# EAGLE board TriggerTone (EAGLE 9.6.1)
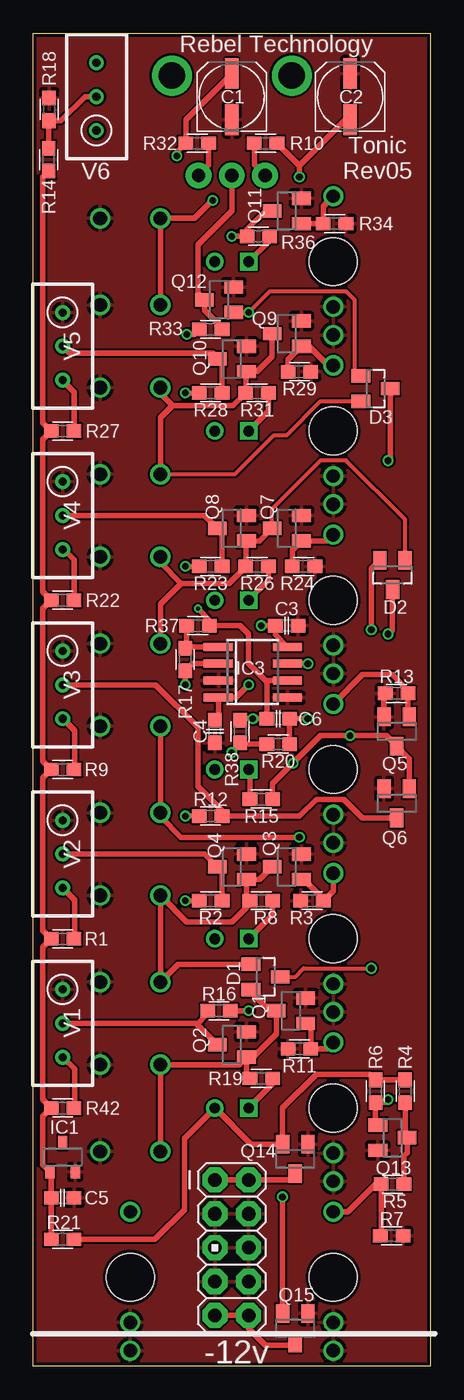
[diagram p0: board, top side]
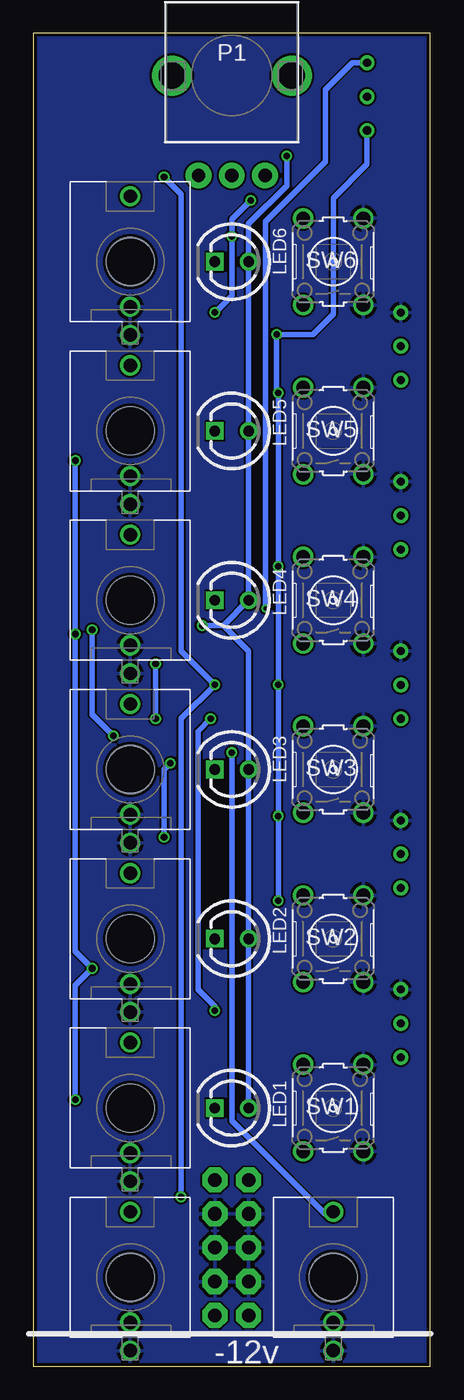
[diagram p1: board, bottom side, seen from below]

Size 29.8 x 100 mm. Coordinates in mm from the lower left corner, seen from the top.
Outline: 0,0 0,100 29.8,100 29.8,0 0,0
Copper layers (1*16): Top 0.035mm / dielectric 1.5mm / Bottom 0.035mm
Design rules "SeeedStudio_2layer_DRU_no_angle_20140221": minimum track width 6mil, minimum drill 12mil, track to track 6mil, track to pad 6mil, pad to pad 6mil, via to via 6mil, smd to smd 0mil, copper to edge 10mil, drill to drill 10mil, minimum pad ring 10mil, minimum via ring 6mil, stop-mask expansion 2mil, vias tented up to drill 100mil, thermal gap 10mil

## Footprints (pad centres in the part's own frame; a part is rotated, then mirrored left to right if it is on the bottom)
CPOL-5 = smd 2.3 x 1: + 1.725,0; - -1.725,0
C0603 = smd 1.1 x 1: 1 -0.85,0; 2 0.85,0
SOT23 = smd 1 x 1.4: 1 -0.95,-1.1; 2 0.95,-1.1; 3 0,1.1
DBZ_R-PDSO-G3 = smd 0.7 x 1: 1 -0.95,-1.1; 2 0.95,-1.1; 3 0,1.1
SO08 = smd 0.6 x 2.2: 1 -1.905,-2.6; 2 -0.635,-2.6; 3 0.635,-2.6; 4 1.905,-2.6; 5 1.905,2.6; 6 0.635,2.6; 7 -0.635,2.6; 8 -1.905,2.6
THONKICONN = drill 1: P$1 0,-5.5; P$2 0,-3.38; P$3 0,4.92 | hole 3.6: 0,0
AVR_ICSP = drill 1.016 pad 1.88 octagon: 1 -1.27,5.08; 2 1.27,5.08; 3 -1.27,2.54; 4 1.27,2.54; 5 -1.27,0; 6 1.27,0; 7 -1.27,-2.54; 8 1.27,-2.54; 9 -1.27,-5.08; 10 1.27,-5.08
LED3MM = drill 0.813: A -1.27,0 | drill 0.813 square: K 1.27,0
POT-ALPS-RK09L1140 = drill 1 pad 1.93: 1 -2.5,-7.5; 2 0,-7.5; 3 2.5,-7.5 | drill 2: P$5 -4.5,0; P$6 4.5,0
0603 = smd 1.1 x 1: 1 -0.85,0; 2 0.85,0
B3F-10XX = drill 1.016: 1 -3.251,2.261; 2 3.251,2.261; 3 -3.251,-2.261; 4 3.251,-2.261
RTRIM3296W = drill 0.61: 1 0,-2.54; 2 0,0; 3 0,2.54

## Placement (x,y rotation side)
C1  47u  [CPOL-5]  14.9,95.25 90 top
C2  47u  [CPOL-5]  23.79,95.25 90 top
C3  100n  [C0603]  19.03,55.56 0 top
C4  100n  [C0603]  13.63,47.62 270 top
C5  100n  [C0603]  2.2,12.64 0 top
C6  39p  [C0603]  18.39,48.58 180 top
D1  BAT54A  [SOT23]  17.44,29.21 270 top
D2  BAT54A  [SOT23]  26.96,59.37 180 top
D3  BAT54A  [SOT23]  25.69,73.34 270 top
IC1  LM4040DIM3-10.0  [DBZ_R-PDSO-G3]  2.2,15.68 0 top
IC3  TL072D  [SO08]  16.49,52.07 270 top
IN_1  THONKICONN  [THONKICONN]  22.52,19.37 0 bottom
IN_2  THONKICONN  [THONKICONN]  22.52,32.07 0 bottom
IN_3  THONKICONN  [THONKICONN]  22.52,44.77 0 bottom
IN_4  THONKICONN  [THONKICONN]  22.52,57.47 0 bottom
IN_5  THONKICONN  [THONKICONN]  22.52,70.17 0 bottom
IN_6  THONKICONN  [THONKICONN]  22.52,82.87 0 bottom
JP8  M05X2PTH  [AVR_ICSP]  14.9,8.89 0 top
LED1  [LED3MM]  14.9,19.37 180 bottom
LED2  [LED3MM]  14.9,32.07 180 bottom
LED3  [LED3MM]  14.9,44.77 180 bottom
LED4  [LED3MM]  14.9,57.47 180 bottom
LED5  [LED3MM]  14.9,70.17 180 bottom
LED6  [LED3MM]  14.9,82.87 180 bottom
OUT_CV  THONKICONN  [THONKICONN]  7.28,6.67 0 bottom
OUT_TR  THONKICONN  [THONKICONN]  22.52,6.67 0 bottom
P1  POT-ALPS-RK09L1140  [POT-ALPS-RK09L1140]  14.9,96.84 0 bottom
Q1  BSS123  [SOT23]  19.34,26.67 90 top
Q2  BSS123  [SOT23]  14.9,24.13 90 top
Q3  BSS123  [SOT23]  19.03,37.47 90 top
Q4  BSS123  [SOT23]  14.9,37.47 90 top
Q5  BSS123  [SOT23]  27.28,47.62 180 top
Q6  BSS123  [SOT23]  27.28,42.23 180 top
Q7  BSS123  [SOT23]  19.03,62.87 90 top
Q8  BSS123  [SOT23]  14.9,62.87 90 top
Q9  BSS123  [SOT23]  19.03,77.47 90 top
Q10  BSS123  [SOT23]  14.9,75.56 90 top
Q11  BSS123  [SOT23]  19.03,86.67 90 top
Q12  BSS123  [SOT23]  13.95,80.01 90 top
Q13  BSS123  [SOT23]  26.96,17.14 270 top
Q14  BSS84  [SOT23]  19.66,15.56 180 top
Q15  BSS123  [SOT23]  19.66,2.86 180 top
R1  51k  [0603]  2.2,32.07 180 top
R2  100k  [0603]  13.31,34.93 0 top
R3  100k  [0603]  20.93,34.93 0 top
R4  1k  [0603]  27.92,20.64 90 top
R5  100R  [0603]  26.96,13.65 0 top
R6  10k  [0603]  25.69,20.64 90 top
R7  1k  [0603]  26.9,9.78 0 top
R8  2k  [0603]  17.12,34.93 0 top
R9  51k  [0603]  2.2,44.77 180 top
R10  36k  [0603]  17.44,91.76 180 top
R11  100k  [0603]  19.98,23.81 0 top
R12  100k  [0603]  13.31,41.28 0 top
R13  100k  [0603]  27.28,50.48 0 top
R14  1M  [0603]  1.15,90.52 270 top
R15  2k  [0603]  17.12,42.55 180 top
R16  100k  [0603]  13.95,26.67 180 top
R17  100k  [0603]  11.41,53.02 270 top
R18  100k  [0603]  1.18,94.3 270 top
R19  2k  [0603]  17.12,21.59 0 top
R20  1k  [0603]  18.39,46.67 0 top
R21  150R  [0603]  2.2,9.53 0 top
R22  33k  [0603]  2.2,57.47 180 top
R23  100k  [0603]  13.31,60.01 0 top
R24  100k  [0603]  20.3,60.01 180 top
R26  2k  [0603]  16.8,60.01 0 top
R27  33k  [0603]  2.2,70.17 180 top
R28  100k  [0603]  13.31,73.02 0 top
R29  100k  [0603]  19.98,74.61 180 top
R31  2k  [0603]  16.8,73.02 0 top
R32  36k  [0603]  12.3,91.76 180 top
R33  100k  [0603]  13.31,77.79 0 top
R34  100k  [0603]  22.62,85.72 180 top
R36  2k  [0603]  16.91,84.77 0 top
R37  100k  [0603]  12.36,55.56 180 top
R38  100k  [0603]  15.53,47.62 90 top
R42  51k  [0603]  2.2,19.37 180 top
SW1  [B3F-10XX]  7.28,19.37 90 bottom
SW2  [B3F-10XX]  7.28,32.07 90 bottom
SW3  [B3F-10XX]  7.28,44.77 90 bottom
SW4  [B3F-10XX]  7.28,57.47 90 bottom
SW5  [B3F-10XX]  7.28,70.17 90 bottom
SW6  [B3F-10XX]  7.28,82.87 90 bottom
V1  B10k  [RTRIM3296W]  2.2,25.72 180 top
V2  B10k  [RTRIM3296W]  2.2,38.42 180 top
V3  B10k  [RTRIM3296W]  2.2,51.12 180 top
V4  B10k  [RTRIM3296W]  2.2,63.82 180 top
V5  B10k  [RTRIM3296W]  2.2,76.52 180 top
V6  B10k  [RTRIM3296W]  4.74,95.25 0 top

## Library data of the parts
C1-C6 IN_1-IN_6 LED1-LED6 OUT_CV OUT_TR P1 R1-R24 R26-R29 R31-R34 R36-R38 R42 = Rebel
D1-D3 = diode
IC1 = texas; MPN: LM4041A12IDBZR; OC_FARNELL: 1407949; OC_NEWARK: 58K5875
IC3 = linear
JP8 = SparkFun
Q1-Q13 = transistor-small-signal
Q14 = transistor-small-signal; OC_FARNELL: 1779264
Q15 = transistor-small-signal; OC_FARNELL: 1843725
SW1-SW6 = switch-omron; MPN: B3F-1000; OC_FARNELL: 176432; OC_NEWARK: 36M3542
V1-V6 = resistor

## Nets
+12V: C1.+ C3.1 IC3.8 LED1.A LED2.A LED3.A LED4.A LED5.A LED6.A Q14.2 R4.2 R6.2 R21.2 R32.2
-12V: C2.- C4.1 IC3.4 Q15.2 R10.1
GND: C1.- C2.+ C3.2 C4.2 C5.2 IC1.2 IC3.3 IC3.5 IN_1.P$1 IN_1.P$2 IN_2.P$1 IN_2.P$2 IN_3.P$1 IN_3.P$2 IN_4.P$1 IN_4.P$2 IN_5.P$1 IN_5.P$2 IN_6.P$1 IN_6.P$2 JP8.3 JP8.4 JP8.5 JP8.6 JP8.7 JP8.8 OUT_CV.P$1 OUT_CV.P$2 OUT_TR.P$1 OUT_TR.P$2 Q1.2 Q2.2 Q3.2 Q4.2 Q5.2 Q6.2 Q7.2 Q8.2 Q9.2 Q10.2 Q11.2 Q12.2 Q13.2 Q14.1 Q15.1 R3.1 R7.2 R11.1 R13.1 R18.1 R24.1 R29.1 R34.1 SW1.3 SW1.4 SW2.3 SW2.4 SW3.3 SW3.4 SW4.3 SW4.4 SW5.3 SW5.4 SW6.3 SW6.4 V1.1 V2.1 V3.1 V4.1 V5.1
N$1: LED1.K R19.2
N$2: OUT_CV.P$3 R20.1 R38.1
N$3: IN_1.P$3 Q1.1 R11.2
N$4: JP8.9 JP8.10 Q15.3
N$5: R1.1 V2.3
N$6: OUT_TR.P$3 R5.1 R7.1
N$7: Q2.3 R16.2 V1.2
N$8: LED3.K R15.2
N$9: LED4.K R26.2
N$10: LED5.K R31.2
N$11: LED6.K R36.2
N$13: IN_2.P$3 Q3.1 R3.2
N$14: LED2.K R8.2
N$15: Q13.3 R4.1 R5.2
N$16: D1.1 Q3.3 Q4.1 R8.1 SW2.1 SW2.2
N$18: Q4.3 R2.2 V2.2
N$19: C5.1 IC1.1 R1.2 R9.2 R14.2 R21.1 R22.2 R27.2 R42.2
N$21: P1.3 R32.1
N$22: D1.3 D2.3 D3.3 Q13.1 R6.1
N$23: R9.1 V3.3
N$24: P1.1 R10.2
N$25: D1.2 Q1.3 Q2.1 R19.1 SW1.1 SW1.2
N$27: R14.1 R18.2 V6.2
N$28: D2.2 Q5.3 Q6.1 R15.1 SW3.1 SW3.2
N$29: IN_3.P$3 Q5.1 R13.2
N$30: Q6.3 R12.2 V3.2
N$32: R22.1 V4.3
N$33: C6.1 IC3.7 R20.2
N$35: IC3.1 R17.1 R37.2
N$37: D2.1 Q7.3 Q8.1 R26.1 SW4.1 SW4.2
N$38: IN_4.P$3 Q7.1 R24.2
N$39: Q8.3 R23.2 V4.2
N$43: R27.1 V5.3
N$44: R42.1 V1.3
N$46: D3.2 Q9.3 Q10.1 R31.1 SW5.1 SW5.2
N$49: IN_5.P$3 Q9.1 R29.2
N$50: Q10.3 R28.2 V5.2
N$54: D3.1 Q11.3 Q12.1 R36.1 SW6.1 SW6.2
N$55: IN_6.P$3 Q11.1 R34.2
N$56: P1.2 Q12.3 R33.2
N$79: JP8.1 JP8.2 Q14.3
NEG: C6.2 IC3.6 R16.1 R37.1 R38.2 V6.3
POS: IC3.2 R2.1 R12.1 R17.2 R23.1 R28.1 R33.1 V6.1

## Tracks (layer width: path | path; a pad name or v marks a point on that pad's centre or on a via)
+12V  (via drill 0.5)
  Top 0.406: IC3.8 18.18,54.89 C3.1 v17.12,55.56 | v10.77,90.8 10.77,91.08 R32.2 11.45,93.53 C1.+ | R21.2 9.12,9.52 11.34,11.75 11.34,17.08 LED1.A 16.34,16.66 Q14.2 18.71,19.37 21.25,21.91 25.27,21.91 R6.2 R4.2
  Bottom 0.406: LED1.A LED2.A LED3.A 13.63,53.66 15.53,55.56 | v17.12,55.56 15.53,55.56 | 15.53,55.56 LED4.A LED5.A LED6.A 13.63,85.72 10.77,88.58 v10.77,90.8
-12V  (via drill 0.5)
  Top 0.406: C4.1 13.89,48.73 IC3.4 15.22,50.16 v16.17,51.12 | Q15.2 v18.71,12.7 | v19.98,89.22 19.98,90.07 | 19.98,90.07 R10.1 | C2.- 23.44,93.52 19.98,90.07
  Bottom 0.406: v18.71,12.7 18.71,48.58 v16.17,51.12 18.71,53.66 18.71,87.95 v19.98,89.22
GND
  Top 0.406: Q5.2 26.33,50.38 R13.1
  pour Top: 30.14,-0.32 -1.61,-0.32 -1.61,101.28 30.14,101.28
  pour Bottom: 31.41,-0.32 -1.61,-0.32 -1.61,101.28 31.41,101.28
N$1
  Top 0.406: R19.2 17.97,21.17 LED1.K
N$2  (via drill 0.5)
  Top 0.406: R20.1 15.64,46.67 R38.1 15.53,46.67 v14.9,46.04
  Bottom 0.406: v14.9,46.04 14.9,18.42 7.92,11.43 7.44,11.43 OUT_CV.P$3
N$3
  Top 0.406: IN_1.P$3 22.04,23.81 R11.2 20.83,25.33 Q1.1
N$4
  Top 0.406: Q15.3 19.49,1.59 17.44,1.59 16.17,2.86 JP8.10 JP8.9
N$5
  Top 0.406: V2.3 3.09,34.99 3.09,32.11 R1.1
N$6
  Top 0.406: R7.1 26.11,9.84 R5.1 25.69,13.65 23.63,11.59 OUT_TR.P$3
N$7
  Top 0.406: V1.2 12.21,25.72 12.29,25.64 | 12.29,25.64 Q2.3 | R16.2 13.1,26.45 12.29,25.64
N$8
  Top 0.406: R15.2 16.27,44.66 LED3.K
N$9
  Top 0.406: R26.2 17.65,58.95 LED4.K
N$10
  Top 0.406: R31.2 17.65,71.65 LED5.K
N$11
  Top 0.406: R36.2 17.76,84.46 LED6.K
N$13
  Top 0.406: IN_2.P$3 22.52,35.66 R3.2 21.78,35.05 20.32,36.51 Q3.1
N$14
  Top 0.406: R8.2 17.97,33.87 LED2.K
N$15
  Top 0.406: R4.1 27.92,17.29 Q13.3 28.06,16.02 27.81,15.77 R5.2
N$16
  Top 0.406: Q3.3 16.98,36.51 Q4.1 16,35.2 | 16,35.2 R8.1 | 16,35.2 16,34.44 14.9,33.34 11.52,33.34 SW2.2 SW2.1 10.88,30.16 D1.1
N$18
  Top 0.406: V2.2 12.85,38.42 Q4.3 14.16,37.1 R2.2
N$19
  Top 0.406: R21.1 C5.1 1.35,14.48 IC1.1 0.72,15.12 0.72,18.73 R42.2 0.72,20 0.72,31.43 R1.2 0.72,32.7 0.72,44.13 R9.2 0.72,45.4 0.72,56.83 R22.2 0.72,58.1 0.72,69.53 R27.2 0.72,70.8 0.72,89.23 R14.2
N$21
  Top 0.406: R32.1 13.15,90.09 P1.3
N$22  (via drill 0.5)
  Top 0.305: D1.3 19.66,29.21 20.3,29.84 v25.38,29.84
  Top 0.406: Q13.1 25.69,18.27 R6.1 26.43,19.79 v26.65,20 | D3.3 26.79,68.09 v26.65,67.94 | D2.3 26.96,55.25 v26.65,54.93
  Bottom 0.406: v26.65,20 26.65,28.58 v25.38,29.84 26.65,31.11 v26.65,54.93 v26.65,67.94
N$23
  Top 0.406: V3.3 3.09,47.69 3.09,44.81 R9.1
N$24
  Top 0.406: R10.2 16.59,90.15 P1.1
N$25
  Top 0.406: SW1.1 SW1.2 15.44,22.62 Q2.1 | D1.2 16.34,28.09 17.93,26.5 Q1.3 18.24,24.93 16.49,23.18 Q2.1 | Q2.1 16,21.86 R19.1
N$27
  Top 0.406: R14.1 1.15,93.42 R18.2 2.07,93.45 3.88,95.25 V6.2
N$28  (via drill 0.5)
  Top 0.406: SW3.2 SW3.1 9.54,41.24 11.09,39.69 v19.98,39.69 | R15.1 17.97,43.71 v19.5,45.24 21.57,47.31 v23.79,47.31 26.5,47.31 Q5.3 28.23,45.58 Q6.1 | D2.2 25.38,59.83 v25.38,55.25
  Bottom 0.406: v19.98,39.69 19.98,44.77 v19.5,45.24 | v25.38,55.25 25.38,48.9 v23.79,47.31
N$29
  Top 0.406: Q5.1 28.13,48.83 R13.2 28.13,50.71 26.96,51.88 24.71,51.88 IN_3.P$3
N$30
  Top 0.406: V3.2 9.19,51.12 12.36,47.94 12.36,43.5 14.16,41.69 R12.2 19.98,41.28 21.25,42.51 23.32,42.51 24.7,41.13 Q6.3
N$32
  Top 0.406: R22.1 3.05,60.52 2.29,61.28 V4.3
N$33  (via drill 0.5)
  Top 0.406: IC3.7 v20.61,52.71 | v20.61,48.58 C6.1 R20.2
  Bottom 0.406: v20.61,52.71 v20.61,48.58
N$35
  Top 0.406: IC3.1 11.51,53.97 | 11.51,53.97 R17.1 11.51,53.97 | R37.2 11.51,53.97
N$37
  Top 0.305: D2.1 27.91,63.5 23.47,67.94 21.57,67.94 17.93,64.3 Q7.3
  Top 0.406: Q7.3 16.98,61.91 Q8.1 15.96,61.87 R26.1 14.69,58.74 11.09,58.74 | SW4.2 9.54,60.29 11.09,58.74 | SW4.1 9.54,57.19 11.09,58.74
N$38
  Top 0.406: R24.2 19.45,61.23 Q7.1 22.05,61.91 IN_4.P$3
N$39
  Top 0.406: V4.2 12.85,63.82 Q8.3 14.16,62.5 R23.2
N$43
  Top 0.406: R27.1 3.05,73.09 2.2,73.94 V5.3
N$44
  Top 0.406: V1.3 3.09,22.29 3.09,19.41 R42.1
N$46
  Top 0.305: SW5.1 15.14,66.92 18.07,69.85 19.03,69.85 21.57,72.39 24.27,72.39
  Top 0.406: SW5.2 9.54,72.99 10.46,72.07 | 10.46,72.07 15,72.07 R31.1 15.96,74.57 Q10.1 16.81,74.61 17.93,75.74 Q9.3 | SW5.1 9.54,71.16 10.46,72.07 | 24.27,72.39 D3.2
N$49
  Top 0.406: R29.2 19.13,75.52 Q9.1 20.71,76.52 22.14,75.09 IN_5.P$3
N$50
  Top 0.406: R28.2 14.16,75.2 Q10.3 13.63,75.74 13.63,75.88 13.5,76.01 2.71,76.01 V5.2
N$54  (via drill 0.5)
  Top 0.305: v16.17,79.06 17.76,80.65 23.47,80.65 24.11,80.01 24.11,74.44 D3.1
  Top 0.406: Q12.1 v16.17,79.06 | v13.47,87.47 12.12,86.12 SW6.2 SW6.1 | Q11.3 17.44,86.68 16.06,85.3 R36.1 v14.9,84.77
  Bottom 0.406: v13.47,87.47 14.9,86.04 v14.9,84.77 14.9,80.33 v16.17,79.06
N$55
  Top 0.406: Q11.1 R34.2 21.77,87.04 IN_6.P$3
N$56
  Top 0.406: R33.2 14.16,77.91 12.85,79.23 Q12.3 12.36,80.49 12.36,84.14 14.9,86.68 P1.2
N$79
  Top 0.406: Q14.3 19.17,13.97 JP8.2 JP8.1
NEG  (via drill 0.3, 0.5)
  Top 0.406: IC3.6 17.44,51.43 | 17.44,51.43 16.17,52.71 16.17,54.93 15.53,55.56 R37.1 13.21,55.98 v12.36,56.83 | 17.44,51.43 17.54,51.33 C6.2 v16.49,48.58 15.64,48.58 R38.2 | R16.1 v16.17,26.67
  Bottom 0.406: v16.17,26.67 16.17,26.99 17.44,28.26 17.44,47.62 v16.49,48.58 | v12.36,56.83 12.36,85.88 7.88,90.36 7.88,95.76 5.85,97.79 V6.3
POS  (via drill 0.5)
  Top 0.406: R28.1 v11.41,73.02 | v11.41,60.01 R23.1 | R2.1 v11.41,34.93 | R12.1 v11.41,41.28 | IC3.2 11.94,52.71 R17.2 v11.41,51.12 | R33.1 12.08,77.41 v11.53,77.41
  Bottom 0.406: v11.41,34.93 v11.41,41.28 v11.41,51.12 v11.41,60.01 v11.41,73.02 11.53,73.15 v11.53,77.41 8.8,77.41 7.28,78.93 7.28,87.63 4.74,90.17 V6.1

## Text on the board
tPlace: Rebel Technology | Tonic / Rev05 | -12v
bPlace: -12v